# Altium PCB Updiy.PcbDoc
Units mm, origin at the board's own origin, x right, y up, seen from the top; angles counter-clockwise.
Board outline 31.72 x 45.72 mm, 2 copper layers (Top Layer, Bottom Layer); 29 components, 44 nets, 145 pads, 41 vias.
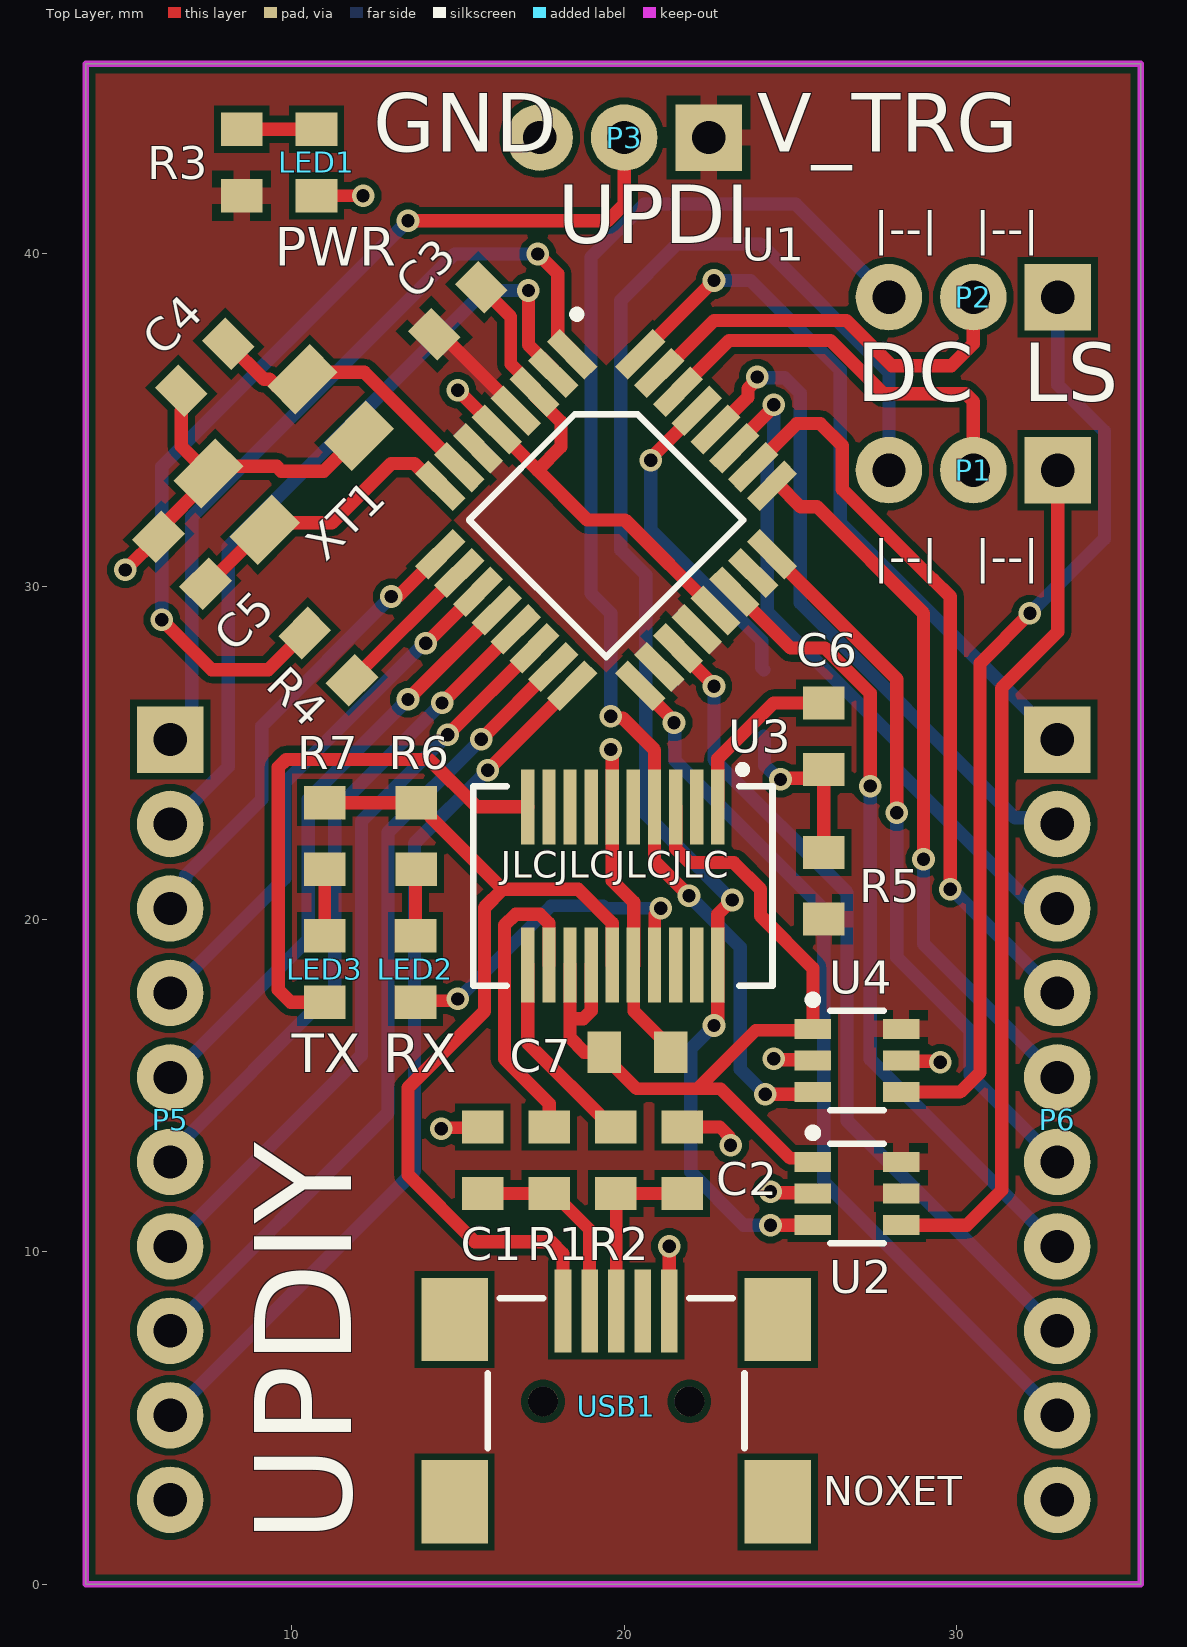
[diagram p0: Top Layer view]
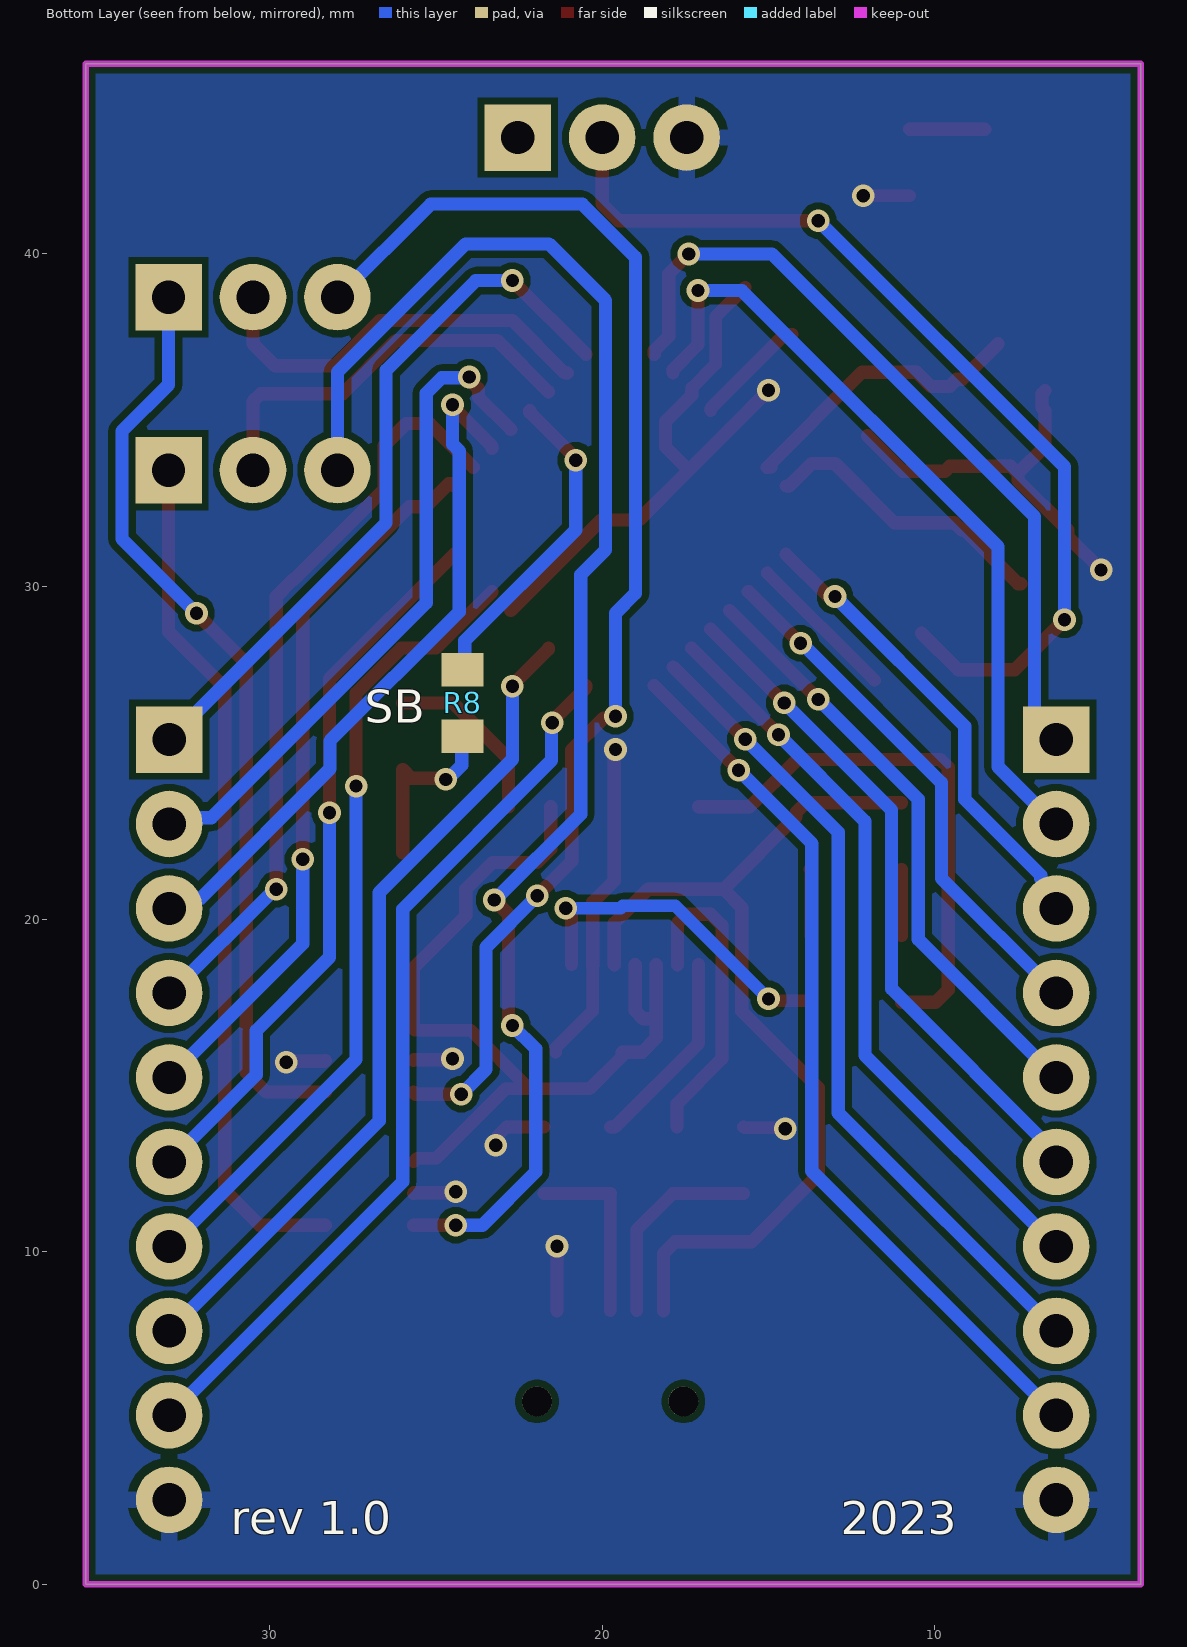
[diagram p1: Bottom Layer view, seen from below]

## Layer stack, top to bottom
Top Solder: solder mask 0.0102, Solder Resist, Dk 3.5
Top Layer: signal copper 0.0356
Dielectric 1: dielectric 0.32, FR-4, Dk 4.8
Bottom Layer: signal copper 0.0356
Bottom Solder: solder mask 0.0102, Solder Resist, Dk 3.5

## Board outline
3.81,0 3.81,45.72 35.53,45.72 35.53,0

## Design rules (kind name [scope] priority, off if disabled: settings)
BoardOutlineClearance [All] p1: gap=0.3 ignorepadtopadclearanceinfootprint=FALSE except(0.4: Arc-SplitBarrior Arc-SplitContinuation Track-SplitBarrior Track-SplitContinuation SMDPad-SplitBarrior SMDPad-SplitContinuation THPad-SplitBarrior THPad-SplitContinuation Via-SplitBarrior Via-SplitContinuation Fill-SplitBarrior Fill-SplitContinuation Poly-SplitBarrior Poly-SplitContinuation Region-SplitBarrior Region-SplitContinuation Text-SplitBarrior Text-SplitContinuation)
Clearance [All] p1: gap=0.2 ignorepadtopadclearanceinfootprint=FALSE except(0.127: Arc-Arc Arc-Track Track-Track SMDPad-SMDPad SMDPad-Via THPad-Via Via-Via; 0.15: SMDPad-Text THPad-Text Via-Text; 0.254: Arc-Via Arc-Text Track-Via Track-Text SMDPad-THPad Fill-Text Poly-Text Region-Text Text-Text; 0.5: THPad-THPad)
HoleSize [All] p1: absolutevalues=TRUE maxlimit=6.3 minlimit=0.2 maxpercent=80.000 minpercent=20.000
HoleToHoleClearance [All] p1: gap=0.254 allowstackedmicrovias=FALSE
MinimumAnnularRing [All] p1: minimumring=0.13
MinimumSolderMaskSliver [All] p1: minsoldermaskwidth=0.13 // Black and white soldermask has 0.13, instead of 0.1mm
PolygonConnect PolygonConnect_1 [All] p1: thpad.connectstyle=Relief thpad.reliefconductorwidth=0.508 thpad.reliefentries=4 thpad.polygonreliefangle="90 Angle" thpad.airgapwidth=0.254 smdpad.connectstyle=Relief smdpad.reliefconductorwidth=0.508 smdpad.reliefentries=4 smdpad.polygonreliefangle="90 Angle" smdpad.airgapwidth=0.254 via.connectstyle=Direct via.reliefconductorwidth=0.508 via.reliefentries=4 via.polygonreliefangle="90 Angle" via.airgapwidth=0.254
RoutingCorners [All] p1: cornerstyle=Round minsetback=2.54 maxsetback=2.54
RoutingVias [All] p1: holewidth=0.4 width=0.6 viastyle="Through Hole" minholewidth=0.2 minwidth=0.35 maxholewidth=1 maxwidth=2
SilkToSilkClearance [All] p1: silktosilkclearance=0.1
SilkToSolderMaskClearance [IsPad] p1: minsilkscreentomaskgap=0.1 clearancetoexposedcopper=TRUE
SolderMaskExpansion [All] p1: expansion=0.05 istentingtop=FALSE
Width [All] p1: maxlimit=2.54 minlimit=0.1 preferedwidth=0.4 toplayer_minwidth=0.2 minimp=50.000000 maximp=50.000000 favimp=50.000000
24 further rules are at their usual default settings.

## Components (designator, comment, footprint, x,y, rotation, side; value= is the part's Value field where it differs from the comment)
C1 "0805, capacitor" "0805, cap" 15.75,13.75 r270 top value=47p
C2 "0805, capacitor" "0805, cap" 21.75,13.75 r270 top value=47p
C3 "0805, capacitor" "0805, cap" 14.286,37.586 r45 top value=100n
C4 "0805, capacitor" "0805, cap" 6.686,35.886 r45 top value=18p
C5 "0805, capacitor" "0805, cap" 6,31.5 r315 top value=18p
C6 "0805, capacitor" "0805, cap" 26,24.5 r90 top value=100n
C7 "0805, capacitor" "0805, cap" 21.4,16 r180 top value=100n
LED1 "0805, LED" 0805_led 10.775,42.75 r90 top value="0805 LED"
LED2 "0805, LED" 0805_led 13.75,18.5 r90 top value="0805 LED"
LED3 "0805, LED" 0805_led 11.025,18.5 r90 top value="0805 LED"
P1 "1x3 Pin Header Mux" padThree_L 30.5,33.5 r180 top value="1x3 Pin Header"
P2 "1x3 Pin Header Mux" padThree_L 30.5,38.7 r180 top value="1x3 Pin Header"
P3 "1x3 Pin Header" padThree_L 20,43.5 r180 top
P5 "1x10 Pin Header" "1x10 PIN HEADER" 6.35,25.4 r270 top locked value="1x8 Pin Header"
P6 "1x10 Pin Header" "1x10 PIN HEADER" 33.02,25.4 r270 top locked value="1x8 Pin Header"
R1 "General resistor" 0805 17.75,13.75 r270 top value=27R
R2 "General resistor" 0805 19.75,13.75 r270 top value=27R
R3 "General resistor" 0805 8.5,43.75 r270 top value=TBD
R4 "General resistor" 0805 11.814,27.186 r135 top value=4k7
R5 "General resistor" 0805 26,22 r270 top value=10k
R6 "General resistor" 0805 13.75,21.5 r90 top value=TBD
R7 "General resistor" 0805 11,23.5 r270 top value=TBD
R8 "General resistor" 0805 24.2,27.5 r270 bottom value=0R
U1 "ATMEGA328PB-AU" TQFP32_P08MM 19.46,32 r315 top locked
U2 "SN74LVC1T45DBVR" SOT23-6 27,11.75 r0 top
U3 "FT231XS-R" SSOP-20_P0.635 19.96,21 r270 top locked
U4 "SN74LVC1T45DBVR" SOT23-6 27,15.75 r0 top
USB1 "UJ2-MBH-1-SMT-TR" USB-MINI_UJ2-MBH-SMT 19.76,5.35 r0 top
XT1 "ABM3C" ABM3B 10.328,36.228 r225 top

## Footprints (in the part's own frame and the unit in brackets; to place one, negate y for a bottom-side part, rotate by r counter-clockwise, add the part's x,y. Pads: shape width x height; smd on the part's side, far side on the other; paste and mask are expansions set on the pad)
"1x10 PIN HEADER" [mm] "1x10 Pin header 2.54 mm pitch"
  rect 2x2 hole 1: 1(0,0)
  round 2 hole 1: 2(2.54,0) 3(5.08,0) 4(7.62,0) 5(10.16,0) 6(12.7,0) 7(15.24,0) 8(17.78,0) 9(20.32,0) 10(22.86,0)
  body extent -1.27,-1.27 24.13,1.27, height 5.94
0805 [mm]
  rect 1x1.25 smd: 0(0,0) 1(2,0)
  body extent 0.03,-0.62 2.03,0.63, height 0.5
"0805, cap" [mm]
  rect 1x1.25 smd: 0(0,0) 1(2,0)
  body extent -0.01,-0.62 1.99,0.63, height 0.8
0805_led [mm]
  rect 1x1.25 smd: 0(-1,0.025) 1(1,0.025)
  body extent -1.03,-0.6 0.99,0.65, height 1.1
ABM3B [mm] "CRYSTAL 20.0000MHZ 10PF SMD"
  rect 1.8x1.2 smd: 1(0,0) 1(0,0) 2(4,0) 3(4,2.4) 4(0,2.4)
  body extent -0.5,-0.39 4.5,2.79, height 1.1
padThree_L [mm] "Pad Diameter 2 mm, Hole  0.3 mm, Pitch 2.54 mm"
  rect 2x2 hole 1: 1(-2.54,0)
  round 2 hole 1: 2(0,0) 3(2.54,0)
  body extent -3.83,-1.38 3.79,1.54, height 8.53
SOT23-6 [mm] "SOT23, 6-Leads, Body 2,90x2,80mm, Pitch 0,95mm, IPC Medium Density"
  rect 1.1x0.6 smd: 1(-1.325,0.95) 2(-1.325,0) 3(-1.325,-0.95) 4(1.325,-0.95) 5(1.325,0) 6(1.325,0.95)
  silkscreen extent -1.45,-1.5 0.8,1.95, body extent -1.4,-1.45 1.4,1.45, height 1.45
SSOP-20_P0.635 [mm]
  rect 2.25x0.4 smd: 1(-2.375,2.857) 2(-2.375,2.222) 3(-2.375,1.587) 4(-2.375,0.952) 5(-2.375,0.317) 6(-2.375,-0.318) 7(-2.375,-0.953) 8(-2.375,-1.588) 9(-2.375,-2.223) 10(-2.375,-2.858) 11(2.375,-2.857) 12(2.375,-2.222) 13(2.375,-1.587) 14(2.375,-0.952) 15(2.375,-0.317) 16(2.375,0.318) 17(2.375,0.953) 18(2.375,1.588) 19(2.375,2.223) 20(2.375,2.858)
  silkscreen extent -3.6,-4.5 3,4.5, body extent -2.96,-4.33 2.96,4.33, height 1.65
TQFP32_P08MM [mm]
  rect 1.6x0.55 smd: 1(-4.25,2.8) 2(-4.25,2) 3(-4.25,1.2) 4(-4.25,0.4) 5(-4.25,-0.4) 6(-4.25,-1.2) 7(-4.25,-2) 8(-4.25,-2.8) 17(4.25,-2.8) 18(4.25,-2) 19(4.25,-1.2) 20(4.25,-0.4) 21(4.25,0.4) 22(4.25,1.2) 23(4.25,2) 24(4.25,2.8)
  rect 0.55x1.6 smd: 9(-2.8,-4.25) 10(-2,-4.25) 11(-1.2,-4.25) 12(-0.4,-4.25) 13(0.4,-4.25) 14(1.2,-4.25) 15(2,-4.25) 16(2.8,-4.25) 25(2.8,4.25) 26(2,4.25) 27(1.2,4.25) 28(0.4,4.25) 29(-0.4,4.25) 30(-1.2,4.25) 31(-2,4.25) 32(-2.8,4.25)
  silkscreen extent -5.1,-2.92 2.92,3.85, body extent -4.6,-4.6 4.6,4.6, height 1.2
USB-MINI_UJ2-MBH-SMT [mm] "CUI Devices UJ2-MBH-SMT"
  rect 0.5x2.5 smd mask+0.05: 1(-1.6,2.87) 2(-0.8,2.87) 3(0,2.87) 4(0.8,2.87) 5(1.6,2.87)
  round 0.9 hole 0.9 unplated mask+0.102: MH(-2.2,0.15)
  round 0.9 hole 0.9 unplated: MH(2.2,0.15)
  rect 2x2.5 smd mask+0.05: SH(-4.86,-2.87) SH(-4.86,2.61) SH(4.86,-2.87) SH(4.86,2.61)
  silkscreen extent -3.86,-1.25 3.86,3.25, body extent -4.83,-5.79 4.83,3.61, height 3.9

## Part data
P1 P2 P3 P5 P6: "2.54 mm"
R1 R2 R3 R4 R5 R6 R7 R8: library part resistor
U1: "RISC Microcontroller, CMOS", Manufacturer=Microchip, Supplier Part Number 1=556-ATMEGA328PB-AU, ComponentLink1Description=https://datasheet.ciiva.com:443/pdfs/VipMasterIC/IC/ATML/ATML-S-A0001248617/ATML-S-A0001248617-1.pdf?src-supplier=IHS+Markit, ComponentLink1URL=https://datasheet.ciiva.com:443/pdfs/VipMasterIC/IC/ATML/ATML-S-A0001248617/ATML-S-A0001248617-1.pdf?src-supplier=IHS+Markit, ComponentLink2Description=http://www.farnell.com/datasheets/2014286.pdf?src-supplier=Farnell, ComponentLink2URL=http://www.farnell.com/datasheets/2014286.pdf?src-supplier=Farnell, ComponentLink3Description=http://www.atmel.com/images/atmel-42397-8-bit-avr-microcontroller-atmega328pb_summary.pdf?src-supplier=Avnet, ComponentLink3URL=http://www.atmel.com/images/atmel-42397-8-bit-avr-microcontroller-atmega328pb_summary.pdf?src-supplier=Avnet, ComponentLink4Description=http://www.microchip.com/mymicrochip/filehandler.aspx?ddocname=en589666&src-supplier=Digi-Key, ComponentLink4URL=http://www.microchip.com/mymicrochip/filehandler.aspx?ddocname=en589666&src-supplier=Digi-Key, ComponentLink5Description=https://datasheet.octopart.com/ATMEGA328PB-AU-Microchip-datasheet-62062422.pdf?src-supplier=Farnell, ComponentLink5URL=https://datasheet.octopart.com/ATMEGA328PB-AU-Microchip-datasheet-62062422.pdf?src-supplier=Farnell, ComponentLink6Description=http://www.farnell.com/datasheets/2014286.pdf?src-supplier=Element14, ComponentLink6URL=http://www.farnell.com/datasheets/2014286.pdf?src-supplier=Element14, ComponentLink7Description=http://www.farnell.com/datasheets/2014286.pdf?src-supplier=Newark, ComponentLink7URL=http://www.farnell.com/datasheets/2014286.pdf?src-supplier=Newark, ComponentLink8Description=https://datasheet.octopart.com/ATMEGA328PB-AU-Microchip-datasheet-81466992.pdf?src-supplier=TME, ComponentLink8URL=https://datasheet.octopart.com/ATMEGA328PB-AU-Microchip-datasheet-81466992.pdf?src-supplier=TME, ComponentLink9Description=https://datasheet.octopart.com/ATMEGA328PB-AU-Microchip-datasheet-154741725.pdf?src-supplier=Electro+Sonic, ComponentLink9URL=https://datasheet.octopart.com/ATMEGA328PB-AU-Microchip-datasheet-154741725.pdf?src-supplier=Electro+Sonic, Manufacturer Part Number=ATMEGA328PB-AU, Pricing 1="1=1,7, 10=1,7, 50=1,56, 100=1,42, 1000=1,42, 10000=1,42 (USD)", RoHS=No, Stock 1=44838, Supplier 1=Mouser, Technology=CMOS
U2 U4: "Bus Transceiver, LVC/LCX/Z Series, 1-Func, 1-Bit, True Output, CMOS, PDSO6, Level shift", Case/Package=LSSOP, Manufacturer="Texas Instruments", Max Operating Temperature=85°C, Max Supply Voltage=5.5V, Min Operating Temperature=-40°C, Min Supply Voltage=1.65V, Nominal Supply Voltage=1.8V, Package Body Material=Plastic, Package Equivalence Code=TSOP6,.11,37, Package Shape=Rectangular, Package Style="SMALL OUTLINE, LOW PROFILE, SHRINK PITCHMeter", Peak Reflow Temperature (Cel)=260°C, Power Supplies=3.3V, Supplier Part Number 1=595-SN74LVC1T45DBVR, Temperature Grade=INDUSTRIAL, Category="Logic Gates", Channels=1, ComponentLink1Description=https://www.ti.com:443/lit/ds/symlink/sn74lvc1t45.pdf?src-supplier=IHS+Markit, ComponentLink1URL=https://www.ti.com:443/lit/ds/symlink/sn74lvc1t45.pdf?src-supplier=IHS+Markit, ComponentLink2Description=https://datasheet.ciiva.com/27055/2000549-27055985.pdf?src-supplier=Jameco, ComponentLink2URL=https://datasheet.ciiva.com/27055/2000549-27055985.pdf?src-supplier=Jameco, ComponentLink3Description=https://datasheet.ciiva.com/23943/1772421-23943378.pdf?src-supplier=Newark, ComponentLink3URL=https://datasheet.ciiva.com/23943/1772421-23943378.pdf?src-supplier=Newark, ComponentLink4Description=https://datasheet.ciiva.com/15086/getdatasheetpartid-309359-15086627.pdf?src-supplier=Verical, ComponentLink4URL=https://datasheet.ciiva.com/15086/getdatasheetpartid-309359-15086627.pdf?src-supplier=Verical, ComponentLink5Description=https://datasheet.ciiva.com/1899/sn74lvc1t45-1899260.pdf?src-supplier=Digi-Key, ComponentLink5URL=https://datasheet.ciiva.com/1899/sn74lvc1t45-1899260.pdf?src-supplier=Digi-Key, ComponentLink6Description=https://datasheet.ciiva.com/1899/sn74lvc1t45-1899261.pdf?src-supplier=Digi-Key, ComponentLink6URL=https://datasheet.ciiva.com/1899/sn74lvc1t45-1899261.pdf?src-supplier=Digi-Key, ComponentLink7Description=https://datasheet.ciiva.com/1899/sn74lvc1t45-1899262.pdf?src-supplier=Digi-Key, ComponentLink7URL=https://datasheet.ciiva.com/1899/sn74lvc1t45-1899262.pdf?src-supplier=Digi-Key, ComponentLink8Description=https://datasheet.ciiva.com/7293/1862463-7293669.pdf?src-supplier=Newark, ComponentLink8URL=https://datasheet.ciiva.com/7293/1862463-7293669.pdf?src-supplier=Newark, Control Type="COMMON CONTROL", Count Direction=Bidirectional, Height - Seated (Max)=1.45mm, JESD-30 Code=R-PDSO-G6, JESD-609 Code=e4, Length=2.9mm, Load/Preset Input=Yes, Logic Type="BUS TRANSCEIVER", Manufacturer Part Number=SN74LVC1T45DBVR, Max I(ol)=24mA, Moisture Sensitivity Level=1, Number of Bits=1, Number of Ports=2, Output Characteristics=3-STATE, Output Polarity=True, Packaging="Tape and Reel", Pins=6, Pricing 1="1=0,61, 10=0,494, 50=0,494, 100=0,367, 1000=0,24, 10000=0,19 (USD)", Propagation Delay (tpd)=17.7ns, Qualification Status="Not Qualified", Reach SVHC Compliant=Yes, RoHS=Yes, RoHS Compliant=Yes, Stock 1=187756, Supplier 1=Mouser, Surface Mount=Yes, Technology=CMOS, Terminal Finish=Nickel, Terminal Form="Gull Wing", Terminal Pitch=0.95mm, Terminal Position=DUAL, Width=1.6mm
U3: "Microprocessor Circuit, CMOS, PDSO20", Case/Package=SSOP, Manufacturer=FTDI, Max Operating Temperature=85°C, Max Supply Current=8.4mA, Max Supply Voltage=5.5V, Min Operating Temperature=-40°C, Min Supply Voltage=2.97V, Nominal Supply Voltage=5V, Package Body Material=Plastic, Package Equivalence Code=SSOP20,.25, Package Shape=Rectangular, Package Style="SMALL OUTLINE, SHRINK PITCHMeter", Power Supplies=3.3/5V, Temperature Grade=INDUSTRIAL, Category="Interface ICs", ComponentLink1Description=https://datasheet.ciiva.com:443/pdfs/VipMasterIC/IC/FTDI/FTDIS00099/FTDIS00099-1.pdf?src-supplier=IHS+Markit, ComponentLink1URL=https://datasheet.ciiva.com:443/pdfs/VipMasterIC/IC/FTDI/FTDIS00099/FTDIS00099-1.pdf?src-supplier=IHS+Markit, ComponentLink2Description=https://datasheet.ciiva.com/30478/0900766b811020d3-30478147.pdf?src-supplier=Rs, ComponentLink2URL=https://datasheet.ciiva.com/30478/0900766b811020d3-30478147.pdf?src-supplier=Rs, ComponentLink3Description=https://datasheet.ciiva.com/1787/ft-x-series-1787028.pdf?src-supplier=Digi-Key, ComponentLink3URL=https://datasheet.ciiva.com/1787/ft-x-series-1787028.pdf?src-supplier=Digi-Key, ComponentLink4Description=https://datasheet.ciiva.com/1787/ft-x-series-1787029.pdf?src-supplier=Digi-Key, ComponentLink4URL=https://datasheet.ciiva.com/1787/ft-x-series-1787029.pdf?src-supplier=Digi-Key, ComponentLink5Description=https://datasheet.ciiva.com/1787/ft-x-series-1787030.pdf?src-supplier=Digi-Key, ComponentLink5URL=https://datasheet.ciiva.com/1787/ft-x-series-1787030.pdf?src-supplier=Digi-Key, ComponentLink6Description=https://datasheet.ciiva.com/48909/70403932-48909078.pdf?src-supplier=Allied+Electronics, ComponentLink6URL=https://datasheet.ciiva.com/48909/70403932-48909078.pdf?src-supplier=Allied+Electronics, Height - Seated (Max)=1.7526mm, JESD-30 Code=R-PDSO-G20, JESD-609 Code=e3, Length=8.6614mm, Manufacturer Part Number=FT231XS-R, Moisture Sensitivity Level=3, Pins=20, Pricing 1="2000=2,15 (USD)", Qualification Status="Not Qualified", Reach SVHC Compliant=Yes, RoHS=Yes, RoHS Compliant=Yes, Stock 1=6000, Supplier 1="Arrow Electronics", Supplier Part Number 1=FT231XS-R, Surface Mount=Yes, Technology=CMOS, Terminal Finish=Tin, Terminal Form="Gull Wing", Terminal Pitch=0.635mm, Terminal Position=DUAL, Width=3.9116mm
USB1: library part "USB Mini SMD", "USB Connector, 5 Contact(s), Female, Right Angle, Surface Mount Terminal, Receptacle", Manufacturer="CUI Devices", Category=Connectors, ComponentLink1Description=https://www.cuidevices.com/product/resource/digikeypdf/uj2-mbh-smt.pdf?src-supplier=Digi-Key, ComponentLink1URL=https://www.cuidevices.com/product/resource/digikeypdf/uj2-mbh-smt.pdf?src-supplier=Digi-Key, Manufacturer Part Number=UJ2-MBH-1-SMT-TR, Pricing 1="750=0,246, 2250=0,2349, 4500=0,2286, 9750=0,2158, 24750=0,2148 (USD)", RoHS=Yes, Stock 1=12000, Supplier 1="Arrow Electronics", Supplier Part Number 1=UJ2-MBH-1-SMT-TR
XT1: library part "XTAL ABM3C", "16 MHz"

## Via types
v1: diameter 0.68, hole 0.4, Top Layer to Bottom Layer, 41 vias

## Nets (pads, with @x,y where several pads share a name; then routed paths per layer and width w, separated by ;. In a path a pad name is that pad's centre, name@x,y a point inside that pad or via, vN(x,y) a via of type N, cw(c..) or ccw(c..) an arc to the next point about the centre after c; other vN are vias at no path point)
ADC6: P6.8 U1.19 | length 25.2
  Top Layer w0.4: U1.19 21.617,28.115 22.7,27.031 v1(22.7,27)
  Bottom Layer w0.4: v1(22.7,27) 22.7,24.8 26.7,20.8 26.7,13.94 P6.8
ADC7: P6.7 U1.22 | length 24.3
  Top Layer w0.4: U1.22 25.007,28.151 26.04,28.151 27.4,26.791 v1(27.4,24)
  Bottom Layer w0.4: v1(27.4,24) 27.4,15.78 P6.7
C_DTR: C6.0 R5.0 R8.1 | length 5.5
  Top Layer w0.4: v1(24.7,24.2) 24.738,24.238 25.738,24.238 C6.0 R5.0
  Bottom Layer w0.4: R8.1 24.221,25.479 24.221,24.625 24.646,24.2 v1(24.7,24.2)
D+: C2.1 R2.1 USB1.3 | length 5.5
  Top Layer w0.381: USB1.3 19.76,11.74 R2.1 C2.1
D-: C1.1 R1.1 USB1.2 | length 6.1
  Top Layer w0.381: C1.1 R1.1 17.875,11.75 18.96,10.665 USB1.2
FTDI_D+: R2.0 U3.11 | length 6
  Top Layer w0.4: U3.11 17.103,16.273 19.625,13.75 R2.0
FTDI_D-: R1.0 U3.12 | length 9.5
  Top Layer w0.4: U3.12 17.738,19.881 17.468,20.15 16.737,20.15 16.4,19.813 16.4,15.8 17.75,14.45 R1.0
FTDI_RX_LS: P2.3 U3.4 U4.3 | length 39.8
  Top Layer w0.4: v1(19.6,26.1) 19.654,26.046 19.954,26.046 20.913,25.087 20.913,21.737 v1(21.95,20.7) ; v1(24.238,14.738) 25.613,14.738 U4.3
  Bottom Layer w0.4: v1(19.6,26.1) 19.6,29.2 19,29.8 19,39.9 20.6,41.5 25.16,41.5 P2.3 ; v1(21.95,20.7) 23.494,19.156 23.494,15.483 v1(24.238,14.738)
FTDI_TX_LS: P1.3 U2.3 U3.20 | length 45.8
  Top Layer w0.4: v1(22.7,16.8) 22.7,16.876 22.818,16.993 22.818,20.143 v1(23.25,20.575) ; v1(24.4,10.8) U2.3
  Bottom Layer w0.4: v1(22.7,16.8) 22,16.1 22,12.4 23.6,10.8 v1(24.4,10.8) ; v1(23.25,20.575) 23.225,20.575 20.646,23.154 20.646,30.354 19.9,31.1 19.9,38.6 21.6,40.3 24.1,40.3 27.96,36.44 P1.3
GND: C1.0 C2.0 C3.1 C4.0 C5.0 C7.0 LED1.0 P3.3 P5.10 P6.10 U1.3 U1.5 U1.21 U2.2 U3.6 U3.16 U4.2 U4.5 USB1.5 XT1.2 XT1.4 | length 49.3
  Top Layer w0.381: LED1.0 v1(12.15,41.75) ; v1(14.5,13.7) 14.525,13.725 15.725,13.725 C1.0 ; C3.1 16.588,38.112 16.588,36.688 17.303,35.973 U1.3 ; U3.16@20.287,18.615 20.287,17.238 21.4,16.125 C7.0 ; C2.0 21.751,13.749 22.876,13.749 23.158,13.466 23.158,13.242 v1(23.2,13.2)
  Top Layer w0.4: v1(5,30.5) C5.0 6,31.7 7.5,33.2 XT1.2 ; C4.0 6.774,35.797 6.774,35.373 6.686,35.285 6.686,34.214 XT1.2 ; XT1.4 10.965,33.471 9.692,33.471 9.551,33.612 7.712,33.612 XT1.2 ; v1(15,35.9) 15,35.897 16.172,34.725 U1.5 17.397,33.497 ; U1.3 17.303,35.748 18.1,34.951 18.1,34.2 17.397,33.497 ; v1(19.6,25.1) 19.643,25.057 19.643,21.158 20.287,20.513 U3.16@20.287,18.615 ; USB1.5 v1(21.36,10.16) ; U1.21@22.748,29.384 U1.21 20.026,32 18.894,32 17.397,33.497 ; v1(24.4,11.8) 24.425,11.775 25.65,11.775 U2.2 ; v1(24.5,15.8) 24.525,15.775 25.65,15.775 U4.2 ; U4.5 28.35,15.725 29.475,15.725 v1(29.5,15.7)
LS_FTDI_RX: P2.1 U4.4 | length 28.1
  Top Layer w0.4: U4.4 30.1,14.8 30.7,15.4 30.7,27.7 v1(32.2,29.2)
  Bottom Layer w0.4: v1(32.2,29.2) 34.44,31.44 34.44,34.666 33.04,36.066 P2.1
LS_FTDI_TX: P1.1 U2.4 | length 25.8
  Top Layer w0.4: U2.4 30.3,10.8 31.35,11.85 31.35,26.95 33.04,28.64 P1.1
NetC4_1: C4.1 U1.7 XT1.1 | length 8.9
  Top Layer w0.381: U1.7@14.921,33.591 U1.7
  Top Layer w0.4: C4.1 9.172,36.228 9.338,36.228 9.551,36.016 10.116,36.016 10.328,36.228 10.541,36.441 12.191,36.441 U1.7
NetC5_1: C5.1 U1.8 XT1.3 | length 8.8
  Top Layer w0.4: C5.1 7.497,30.086 9.114,31.703 XT1.3 9.409,31.915 11.215,31.915 13,33.7 13.694,33.7 14.369,33.025 U1.8
NetC6_1: C6.1 U3.1 | length 5.3
  Top Layer w0.4: U3.1 22.818,24.817 24.5,26.5 C6.1
NetLED1_1: LED1.1 R3.0 | length 2.3
  Top Layer w0.4: R3.0 LED1.1
NetLED2_0: LED2.0 U3.17 | length 10.4
  Top Layer w0.381: LED2.0 13.775,17.55 14.95,17.55 v1(15,17.6) ; U3.17 20.922,18.634 20.922,20.149 v1(21.1,20.327)
  Bottom Layer w0.381: v1(15,17.6) 17.8,20.4 19.373,20.4 19.446,20.327 v1(21.1,20.327)
NetLED2_1: LED2.1 R6.0 | length 2
  Top Layer w0.381: LED2.1 13.725,21.475 R6.0
NetLED3_0: LED3.0 U3.10 | length 16.4
  Top Layer w0.4: LED3.0 9.976,17.5 9.6,17.876 9.6,24.566 9.834,24.8 14.141,24.8 15.566,23.375 U3.10
NetLED3_1: LED3.1 R7.1 | length 2
  Top Layer w0.381: LED3.1 R7.1
NetP1_2: P1.2 U1.30 | length 12.3
  Top Layer w0.4: U1.30 23.163,37.4 26.2,37.4 27.8,35.8 30.266,35.8 30.5,35.566 P1.2
NetP2_2: P2.2 U1.31 | length 12.3
  Top Layer w0.4: U1.31 21.122,36.419 22.702,38 26.68,38 28.042,36.638 29.838,36.638 30.5,37.3 P2.2
PB0: P5.5 U1.12 | length 18.1
  Top Layer w0.4: v1(13.5,26.606) U1.12
  Bottom Layer w0.4: P5.5 6.478,15.368 10.5,19.39 10.5,23.606 v1(13.5,26.606)
PB1: P5.6 U1.13 | length 20.3
  Top Layer w0.4: v1(14.526,26.5) U1.13
  Bottom Layer w0.4: P5.6 6.35,12.95 11.3,17.9 11.3,23.274 v1(14.526,26.5)
PB2: P5.7 U1.14 | length 22.5
  Top Layer w0.4: v1(14.7,25.543) U1.14
  Bottom Layer w0.4: P5.7 12.1,15.91 12.1,22.943 v1(14.7,25.543)
PB3: P5.8 U1.15 | length 24.7
  Top Layer w0.4: v1(15.7,25.412) U1.15
  Bottom Layer w0.4: P5.8 12.9,14.17 12.9,22.612 v1(15.7,25.412)
PB4: P5.9 U1.16 | length 26.9
  Top Layer w0.4: v1(15.9,24.48) U1.16
  Bottom Layer w0.4: P5.9 13.696,12.426 13.696,22.276 v1(15.9,24.48)
PB5: P6.9 U1.17 | length 27.1
  Top Layer w0.4: U1.17 20.485,26.965 21.5,25.95 v1(21.5,25.9)
  Bottom Layer w0.4: v1(21.5,25.9) 21.525,25.875 21.525,24.775 26,20.3 26,12.1 P6.9
PC1: P6.6 U1.24 | length 21.8
  Top Layer w0.4: U1.24 28.2,27.22 v1(28.2,23.2)
  Bottom Layer w0.4: v1(28.2,23.2) 28.2,18.849 30.4,16.649 30.4,15.32 P6.6
PC2: P6.5 U1.25 | length 22.2
  Top Layer w0.4: U1.25 24.507,33.087 24.613,33.087 25.3,32.4 25.8,32.4 29,29.2 v1(29,21.8)
  Bottom Layer w0.4: v1(29,21.8) 29,19.26 P6.5 P6.5@33.02,15.673
PC3: P6.4 U1.26 | length 22.7
  Top Layer w0.4: U1.26 25.188,34.9 25.9,34.9 26.56,34.24 26.56,32.92 29.28,30.2 29.3,30.2 29.8,29.7 v1(29.8,20.9)
  Bottom Layer w0.4: v1(29.8,20.9) 29.85,20.9 32.97,17.78 P6.4
PC4: P6.3 U1.27 | length 21
  Top Layer w0.4: U1.27 23.314,34.218 24.5,35.405 v1(24.5,35.466)
  Bottom Layer w0.4: v1(24.5,35.466) 24.5,34.275 24.3,34.075 24.3,29.245 28.187,25.358 28.187,24.513 32.074,20.626 32.714,20.626 P6.3
PC5: P6.2 U1.28 | length 20.4
  Top Layer w0.4: U1.28 23.721,35.695 23.721,35.953 24,36.232 v1(24,36.3)
  Bottom Layer w0.4: v1(24,36.3) 24.021,36.279 24.823,36.279 25.294,35.808 25.294,29.506 31.749,23.051 32.829,23.051 P6.2
PD2: P6.1 U1.32 | length 21.9
  Top Layer w0.4: U1.32 v1(22.7,39.2)
  Bottom Layer w0.4: v1(22.7,39.2) 23.8,39.2 26.5,36.5 26.5,31.92 P6.1
PD3: P5.1 U1.1 | length 24.1
  Top Layer w0.4: v1(17.4,40) 18,39.4 18,37.526 18.435,37.091 U1.1
  Bottom Layer w0.4: P5.1 7,26.05 7,32.1 14.9,40 v1(17.4,40)
PD4: P5.2 U1.2 | length 24.1
  Top Layer w0.4: v1(17.121,38.9) 17.121,37.274 17.869,36.525 U1.2
  Bottom Layer w0.4: P5.2 6.376,22.86 8.1,24.584 8.1,31.2 15.8,38.9 v1(17.121,38.9)
PD5: P5.3 U1.9 | length 14.1
  Top Layer w0.4: v1(13,29.7) 13.038,29.738 13.238,29.738 U1.9
  Bottom Layer w0.4: P5.3 6.35,20.753 6.816,21.219 6.816,21.316 9.1,23.6 9.1,25.8 v1(13,29.7)
PD7: P5.4 U1.11 | length 15.9
  Top Layer w0.4: v1(14.036,28.295) 14.047,28.295 15.595,29.843 U1.11
  Bottom Layer w0.4: P5.4 9.8,21.23 9.8,24.1 13.995,28.295 v1(14.036,28.295)
RESET: R8.0 U1.29 | length 9.8
  Top Layer w0.4: v1(20.8,33.8) 20.8,33.853 22.182,35.235 U1.29
  Bottom Layer w0.4: v1(20.8,33.8) 20.8,31.7 24.134,28.366 24.134,27.566 R8.0
UPDI: P3.2 R4.1 | length 29.6
  Top Layer w0.4: v1(6.1,29) 7.6,27.5 9.3,27.5 R4.1 ; v1(13.5,41) 19.5,41 20,41.5 P3.2
  Bottom Layer w0.381: P3.2@19.562,43.5 P3.2
  Bottom Layer w0.4: v1(6.1,29) 6.1,33.6 v1(13.5,41)
UPDI_R: R4.0 U1.10 | length 4.6
  Top Layer w0.381: R4.0 11.817,27.186 U1.10
V_TRG: C3.0 P3.1 R3.1 R5.1 U1.4 U1.6 U1.18 U1.20 U2.5 U2.6 U4.6 | length 3.4
  Top Layer w0.381: C3.0 14.513,37.586 16.738,35.361 U1.4
VCCIO: C7.1 U2.1 U3.3 U3.13 U3.14 U4.1 | length 26.6
  Top Layer w0.381: U3.14 U3.14@19.017,18.615 ; C7.1 19.4,15.875 20.375,14.9 22.2,14.9 ; U2.1 25.565,12.809 24.991,12.809 22.9,14.9 22.2,14.9 ; U4.1 25.636,16.661 23.961,16.661 22.2,14.9
  Top Layer w0.4: U3.13 18.373,17 ; U3.14 19.008,17.242 18.773,17.007 18.38,17.007 18.373,17 ; C7.1 18.8,16 18.373,16.428 18.373,17 ; U3.3 21.548,22.119 21.967,21.7 23.3,21.7 24.1,20.9 24.1,20.1 25.675,18.525 U4.1
VUSB: R6.1 R7.0 U3.15 USB1.1 | length 28.6
  Top Layer w0.4: R7.0 13.875,23.5 14.175,23.2 14.175,23.075 16.35,20.9 ; USB1.1 18.16,9.94 17.8,10.3 15.509,10.3 13.5,12.309 13.5,14.934 15.8,17.234 15.8,20.35 16.35,20.9 ; U3.15 19.643,19.881 18.623,20.9 16.35,20.9
pads on no net: U1.23 U3.2 U3.5 U3.7 U3.8 U3.9 U3.18 U3.19 USB1.4 USB1.MH USB1.SH

## Polygon pours and split planes (outlines as drawn)
GND on Bottom Layer "GND_L02_P000" (solid, remove dead copper, pour order 0): 2.5,46.5 36.5,46.5 36.5,-1 2.5,-1
V_TRG on Top Layer "V_TRG_L01_P001" (solid, remove dead copper, pour order 1): 3,46.5 36.5,46.5 36.5,-1 3,-1

## Keep-outs
Keep-Out Layer:
  the board outline again, w0.2

## Silkscreen, mask and mechanical layers (free items; w line width, h text height)
Top Overlay:
  text "GND" at 12.45,42.5 h3
  text "V_TRG" at 24,42.5 h3
  text "|--|" at 27.506,40.272 h1
  text "|--|" at 30.554,40.272 h1
  text "UPDI" at 18,39.75 h3
  text "PWR" at 9.5,39.25 h2
  text "DC" at 27,35 h3
  text "LS" at 32,35 h3
  text "|--|" at 27.506,30.42 h1
  text "|--|" at 30.554,30.42 h1
  text "JLCJLCJLCJLC" at 16.283,21.25 h0.8
  text "TX" at 10,15 h2
  text "RX" at 12.75,15 h2
  text "NOXET" at 25.987,2.093 h1.5
  text "UPDIY" at 12.75,1.25 h5 r90
Bottom Overlay:
  text "SB" at 27.133,25.9 h1
  text "2023" at 12.833,1.5 h1
  text "rev 1.0" at 31.166,1.5 h1

## Text inside footprints (layer, text, board x,y; h text height)
USB1: Mechanical 13 "PCB Edge" at 24.628,-1.183 h1